# EAGLE board JetBotFor4GBWIfiAntennaSupport_partsRev2 (EAGLE 9.6.0)

Size 109.98 x 32.39 mm. Coordinates in mm from the lower left corner, seen from the top.
Outline: 80.99,2.3 80.99,11 105.7,16.43 arc168 98.89,32 66.99,25 42.99,25 11.09,32 arc168 4.29,16.43 28.99,11 28.99,2.3 arc90 31.29,0 78.69,0 arc90 80.99,2.3
Outline: 101.14,25 arc-90 104.49,28.35 arc-59 107.14,26.9 107.14,23.1 arc-59 104.49,21.65 arc-90 101.14,25
Outline: 8.84,25 arc90 5.49,28.4 arc59 2.84,26.9 2.84,23.1 arc59 5.49,21.65 arc90 8.84,25
Copper layers (1*16): Top 0.035mm / dielectric 1.5mm / Bottom 0.035mm
Design rules "SeeedStudio_2layer_DRU_no_angle_20140221": minimum track width 6mil, minimum drill 12mil, track to track 6mil, track to pad 6mil, pad to pad 6mil, via to via 6mil, smd to smd 0mil, copper to edge 10mil, drill to drill 10mil, minimum pad ring 10mil, minimum via ring 6mil, stop-mask expansion 2mil, vias tented up to drill 100mil, thermal gap 10mil
Holes 3.6 mm at 32.99,5.5 76.99,5.5 32.99,15.5 76.99,15.5

## Placement (x,y rotation side)
E$1  [LOGO_FABO_L]  54.99,9.42 0 top

## Library data of the parts
E$1 = FaBo-Logo

## Text on the board
tPlace: Designed in Aizu
bPlace: Rev2 | BOTTOM | JB4-WS
tDocu: 長径 6.7mm / 短径 6.0mm *2 | Φ3.6mm*4 | ナットドライバ 9mm | JetRacerWifiSupportRev2(JB-WS)